# Altium PCB Ebytastic_v0.1.PcbDoc
Units mm, origin at the board's own origin, x right, y up, seen from the top; angles counter-clockwise.
Board outline 55.6 x 41.91 mm, 2 copper layers (Top Layer, Bottom Layer); 11 components, 36 nets, 103 pads, 57 vias.
Unrouted connection lines stored in the file: 6.
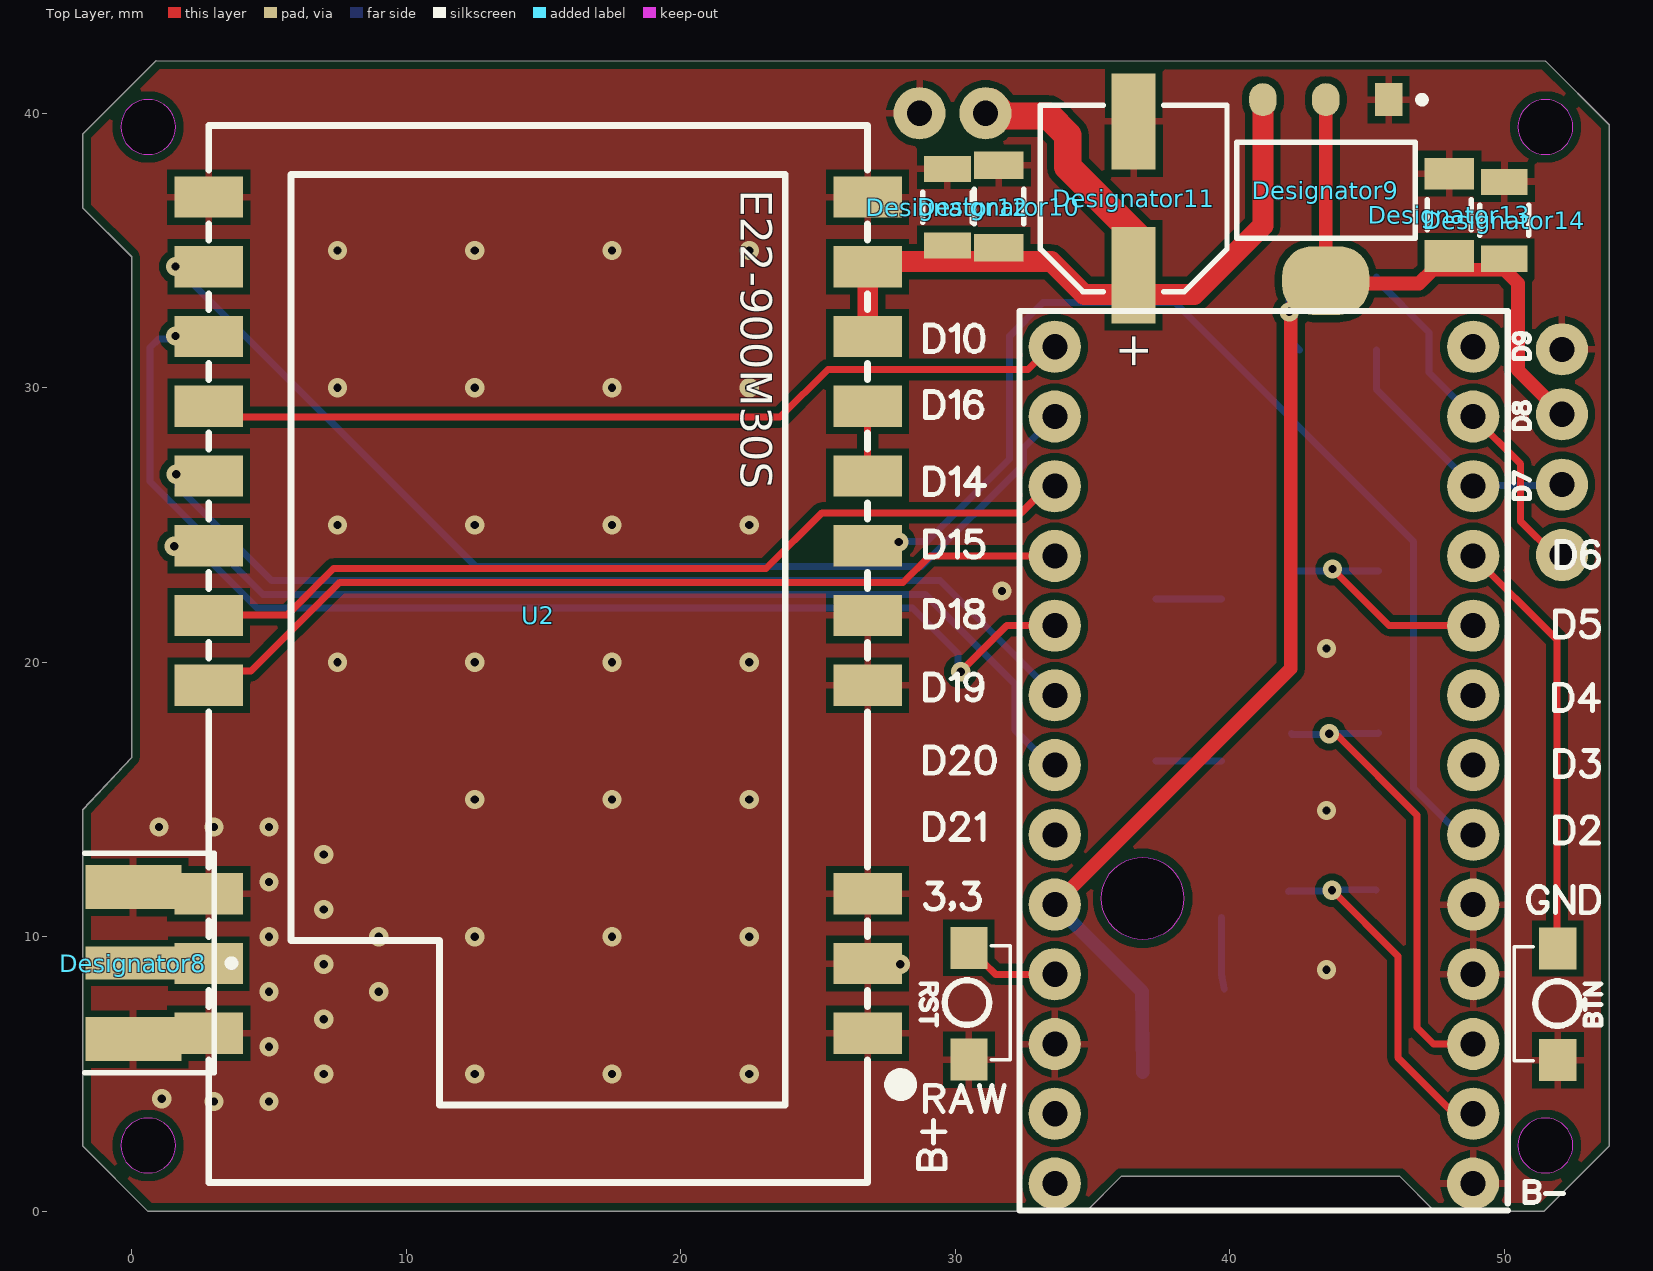
[diagram p0: Top Layer view]
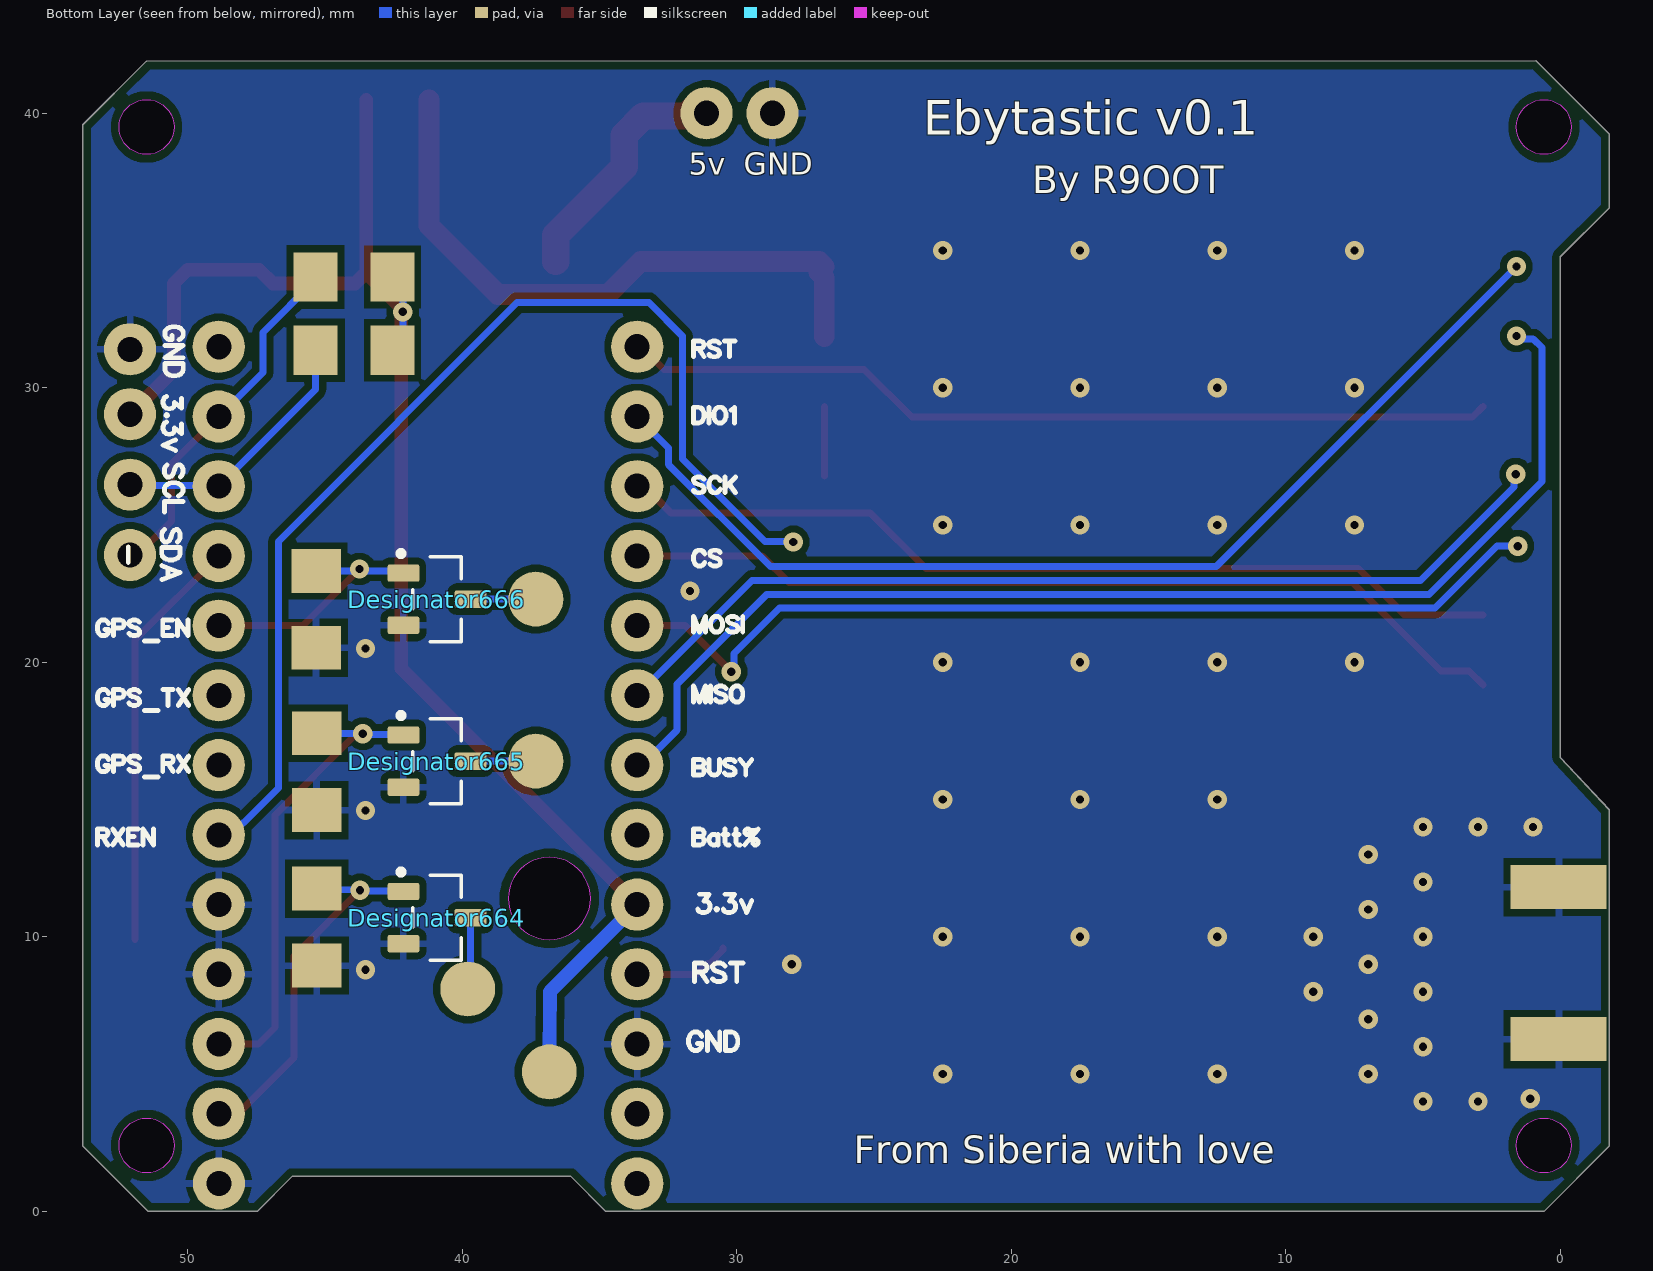
[diagram p1: Bottom Layer view, seen from below]
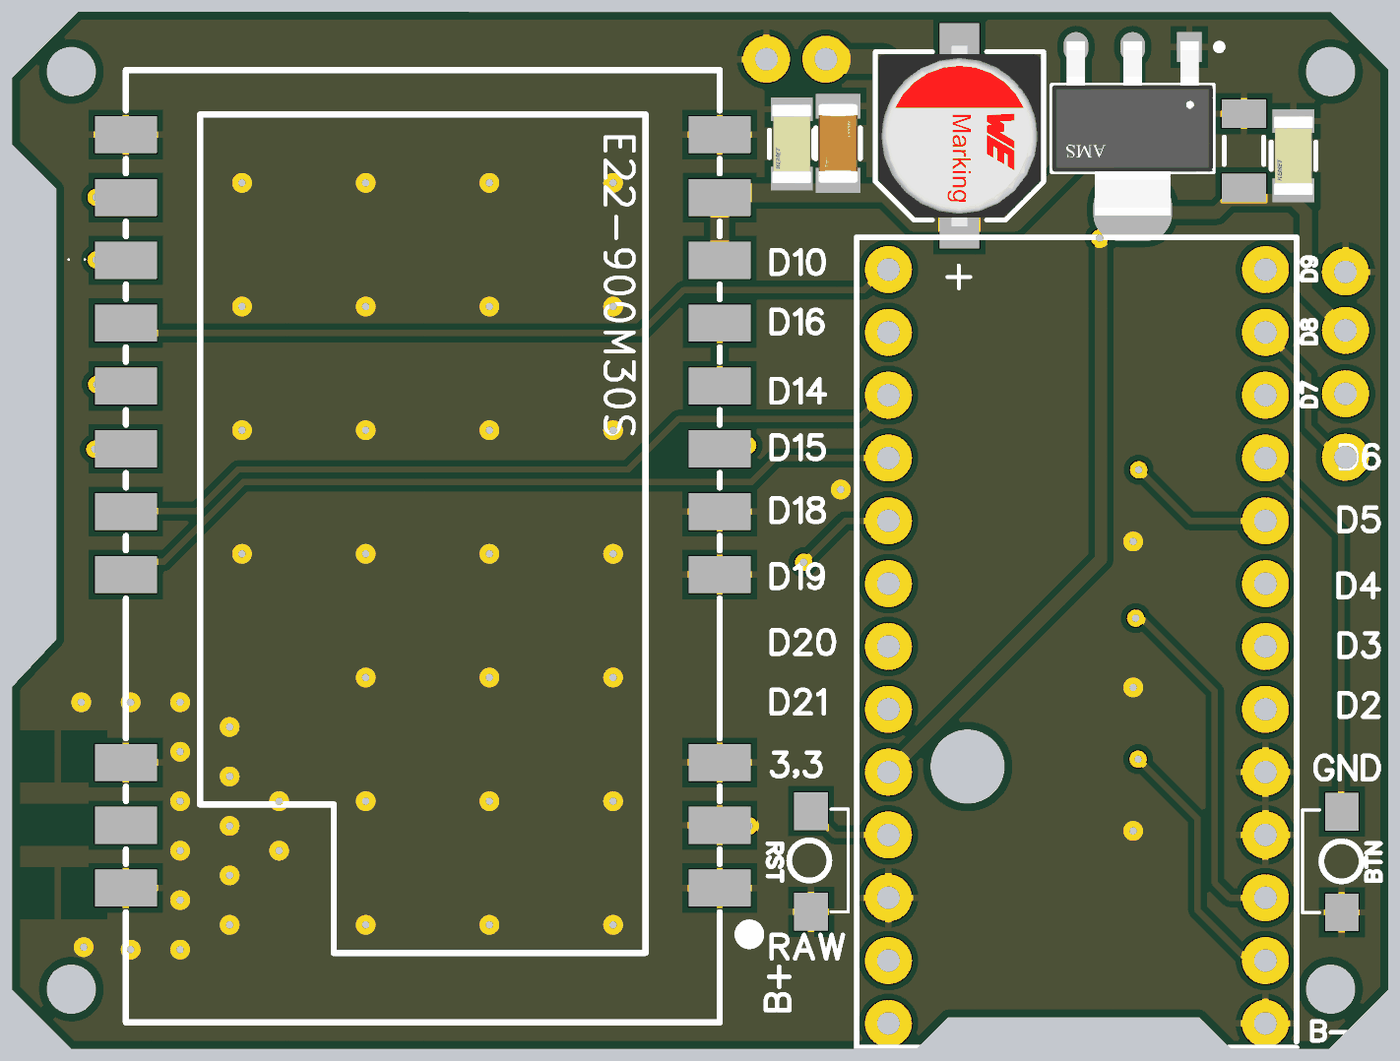
[diagram p2: 3D render of the assembled board from above, using the file's embedded part models]
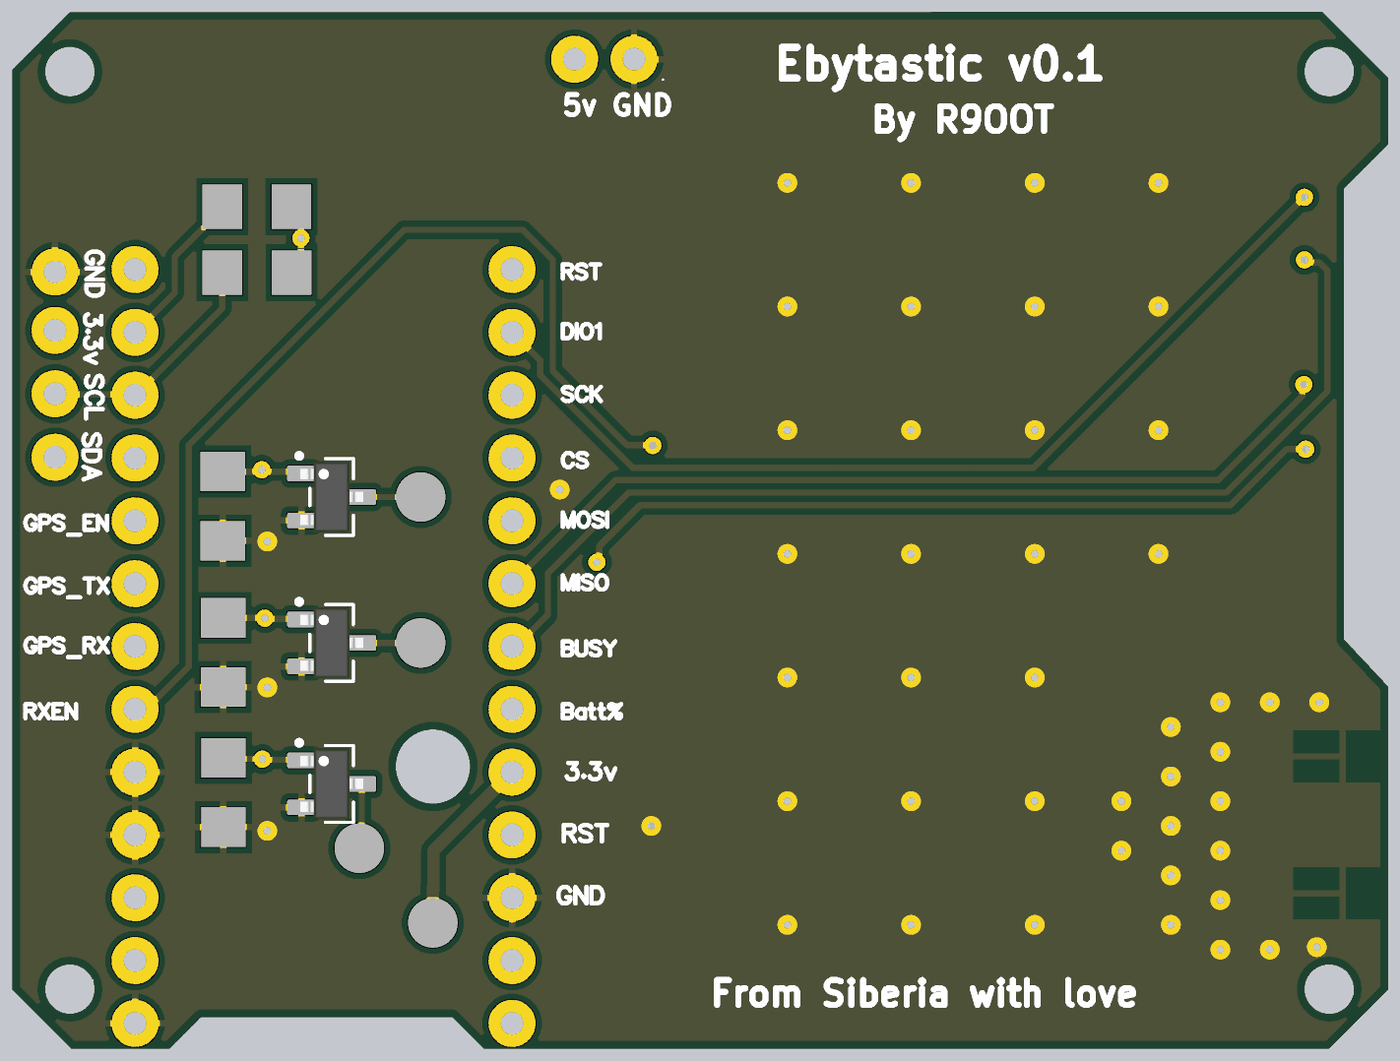
[diagram p3: 3D render of the assembled board from below, using the file's embedded part models]

## Layer stack, top to bottom
Top Solder: solder mask 0.0102, Solder Resist, Dk 3.5
Top Layer: signal copper 0.0356
Dielectric 1: dielectric 0.32, FR-4, Dk 4.8
Bottom Layer: signal copper 0.0356
Bottom Solder: solder mask 0.0102, Solder Resist, Dk 3.5

## Board outline
0.889,41.91 -1.778,39.243 -1.778,36.549 0,34.771 0,16.535 -1.778,14.63 -1.778,2.378 0.6,0 34.771,0 36.041,1.27 46.201,1.27 47.471,0 51.435,0 53.821,2.386 53.821,39.579 51.5,41.9
cut-out: -0.4,2.4 ccw(c0.6,2.4) 0.6,1.4 ccw(c0.6,2.4) 1.6,2.4 ccw(c0.6,2.4) 0.6,3.4 ccw(c0.6,2.4)
cut-out: -0.4,39.5 ccw(c0.6,39.5) 0.6,38.5 ccw(c0.6,39.5) 1.6,39.5 ccw(c0.6,39.5) 0.6,40.5 ccw(c0.6,39.5)
cut-out: 50.5,39.5 ccw(c51.5,39.5) 51.5,38.5 ccw(c51.5,39.5) 52.5,39.5 ccw(c51.5,39.5) 51.5,40.5 ccw(c51.5,39.5)
cut-out: 36.828,9.9 cw(c36.828,11.4) 35.328,11.4 cw(c36.828,11.4) 36.828,12.9 cw(c36.828,11.4) 38.328,11.4 cw(c36.828,11.4)
cut-out: 50.5,2.4 ccw(c51.5,2.4) 51.5,1.4 ccw(c51.5,2.4) 52.5,2.4 ccw(c51.5,2.4) 51.5,3.4 ccw(c51.5,2.4)

## Design rules (kind name [scope] priority, off if disabled: settings)
BoardOutlineClearance [All] p1: gap=0.3 ignorepadtopadclearanceinfootprint=FALSE
Clearance [All] p1: gap=0.25 ignorepadtopadclearanceinfootprint=FALSE
PolygonConnect [All] p1: thpad.connectstyle=Relief thpad.reliefconductorwidth=0.254 thpad.reliefentries=4 thpad.polygonreliefangle="90 Angle" thpad.airgapwidth=0.254 smdpad.connectstyle=Relief smdpad.reliefconductorwidth=0.254 smdpad.reliefentries=4 smdpad.polygonreliefangle="90 Angle" smdpad.airgapwidth=0.254 via.connectstyle=Direct via.reliefconductorwidth=0.254 via.reliefentries=4 via.polygonreliefangle="90 Angle" via.airgapwidth=0.254
RoutingVias [All] p1: holewidth=0.711 width=1.27 viastyle="Through Hole" minholewidth=0.711 minwidth=1.27 maxholewidth=0.711 maxwidth=1.27
SilkToSilkClearance [All] p1: silktosilkclearance=0.15
SilkToSolderMaskClearance [IsPad] p1: minsilkscreentomaskgap=0.15 clearancetoexposedcopper=TRUE
SolderMaskExpansion [All] p1: expansion=0.05 istentingtop=FALSE
Width [All] p1: maxlimit=1 minlimit=0.25 preferedwidth=0.4 minimp=50.000000 maximp=50.000000 favimp=50.000000
28 further rules are at their usual default settings.

## Components (designator, comment, footprint, x,y, rotation, side; value= is the part's Value field where it differs from the comment)
Designator8 "Comment" FP-CON-SMA-EDGE-S-MFG -7.2,9.042 r90 top
Designator9 "Comment" FP-AMS1117-IPC_C 43.5,37.2 r270 top
Designator10 "Comment" FP-CC1206-1_25-MFG 31.592,36.6 r90 top
Designator11 "Comment" WCAP-AS5H_D6.3H7.7 36.5,36.9 r270 top
Designator12 "Comment" FP-C1206C-EB-MFG 29.718,36.576 r90 top
Designator13 "Comment" CAPC1206(3216)130_N 48,36.3 r90 top
Designator14 "Comment" FP-C1206C-EB-MFG 50,36.1 r90 top
Designator664 "Comment" SOT23-3 40.921,10.7 r270 bottom
Designator665 "Comment" SOT23-3 40.921,16.4 r270 bottom
Designator666 "Comment" SOT23-3 40.921,22.3 r270 bottom
U2 "E22-900M30S" WIRELM-SMD_E22-900M30S 14.808,21.717 r0 top

## Footprints (in the part's own frame and the unit in brackets; to place one, negate y for a bottom-side part, rotate by r counter-clockwise, add the part's x,y. Pads: shape width x height; smd on the part's side, far side on the other; paste and mask are expansions set on the pad)
CAPC1206(3216)130_N [mm] "Chip Capacitor, Body 3.2x1.6mm, Height 1.3mm, IPC Medium Density"
  rect 1.15x1.8 smd: 1(-1.5,0) 2(1.5,0)
  silkscreen extent -0.55,-0.8 0.55,0.8, body extent -1.7,-0.9 1.7,0.9, height 1.3
FP-AMS1117-IPC_C [mm]
  rect 1.2x1 smd paste+0 mask+0: 1(-3.295,2.29)
  rrect100% 1.2x1 smd paste+0 mask+0: 2(-3.295,0) 3(-3.295,-2.29)
  rrect87% 2.5x3.182 smd paste+0 mask+0: 4(3.295,0)
  silkscreen extent -3.42,-3.25 1.75,3.63, body extent -3.9,-3.35 3.9,3.35, height 0.25
FP-C1206C-EB-MFG [mm]
  rect 0.95x1.7 smd paste+0 mask+0: 1(-1.4,0) 2(1.4,0)
  silkscreen extent -0.55,-0.9 0.55,0.9, body extent -2,-1 2,1, height 0.25
FP-CC1206-1_25-MFG [mm]
  rect 1x1.8 smd paste+0 mask+0: 1(-1.5,0) 2(1.5,0)
  silkscreen extent -0.63,-0.9 0.63,0.9, body extent -2.2,-1.25 2.2,1.25, height 0.25
FP-CON-SMA-EDGE-S-MFG [mm]
  rect 1.2x3.5 smd paste+0 mask+0: 1(0,-7.26)
  rect 1.6x3.5 smd paste+0 mask+0: 2(-2.77,-7.26) 3(2.77,-7.26)
  rect 1.6x3.5 smd far side paste+0 mask+0: 4(-2.77,-7.26) 5(2.77,-7.26)
  silkscreen extent -4,-10.96 4,-5.5, body extent -3.67,-9.86 3.67,4.86, height 0.25
SOT23-3 [mm]
  rrect20% 0.63x1.15 smd: 1(-0.95,-1.22) 2(0.95,-1.22) 3(0,1.22)
  silkscreen extent -1.76,-1.41 1.55,0.88, body extent -1.44,-1.27 1.44,1.28, height 1.45
WCAP-AS5H_D6.3H7.7 [mm] "Aluminum Electrolytic Capacitors, 6.3x7.7mm"
  rect 3.5x1.6 smd: 1(2.8,0) 2(-2.8,0)
  silkscreen extent -3.4,-3.4 3.4,3.4, body extent -3.65,-3.3 3.65,3.3, height 7.7
WIRELM-SMD_E22-900M30S [mm]
  rect 2.5x1.5 smd paste+0 mask+0.051: 1(12,-15.23) 2(12,-12.69) 3(12,-10.15) 4(12,-2.55) 5(12,-0.01) 6(12,2.53) 7(12,5.07) 8(12,7.61) 9(12,10.15) 10(12,12.69) 11(12,15.23) 12(-12,15.23) 13(-12,12.69) 14(-12,10.15) 15(-12,7.61) 16(-12,5.07) 17(-12,2.53) 18(-12,-0.01) 19(-12,-2.55) 20(-12,-10.15) 21(-12,-12.69) 22(-12,-15.23)
  silkscreen extent -12,-20.66 13.5,17.84

## Part data
Designator664 Designator665 Designator666: library part 1-009-727

## Free pads (board coordinates)
  round 0.102 on Top Overlay: 1(0.488,31.9) 1(1.143,31.9)
  round 0.102 on Bottom Overlay: 1(27.532,39.173)
  round 1.9 hole 0.915: 1(28.7,40) 1(31.1,40) 1(33.628,1.016) 1(33.628,3.556) 1(33.628,6.096) 1(33.628,8.636) 1(33.628,11.176) 1(33.628,13.716) 1(33.628,16.256) 1(33.628,18.796) 1(33.628,21.336) 1(33.628,23.876) 1(33.628,26.416) 1(33.628,28.956) 1(33.628,31.496) 1(48.865,1.016) 1(48.868,3.556) 1(48.868,6.096) 1(48.868,8.636) 1(48.868,11.176) 1(48.868,13.716) 1(48.868,16.256) 1(48.868,18.796) 1(48.868,21.336) 1(48.868,23.876) 1(48.868,26.416) 1(48.868,28.956) 1(48.868,31.496) 1(52.1,31.4) 1(52.102,23.907) 1(52.102,26.472) 1(52.102,29.038)
  rect 1.36x1.53 smd paste+0: 1(30.5,5.53) 1(30.5,9.6) 1(51.954,5.505) 1(51.954,9.575)
  rect 1.6x1.8 smd far side paste+0: 1(42.539,31.369) 1(42.545,34.036) 1(45.339,31.369) 1(45.345,34.036)
  rect 1.8x1.6 smd far side paste+0: 1(45.297,8.954) 1(45.297,11.754) 1(45.306,14.615) 1(45.306,17.415) 1(45.321,20.53) 1(45.321,23.33)
  round 2 smd far side: 2(36.83,5.08) 2(37.321,16.4) 2(37.321,22.3) 2(39.8,8.1)

## Via types
v1: diameter 0.7, hole 0.3, Top Layer to Bottom Layer, 57 vias

## Nets (pads, with @x,y where several pads share a name; then routed paths per layer and width w, separated by ;. In a path a pad name is that pad's centre, name@x,y a point inside that pad or via, vN(x,y) a via of type N, cw(c..) or ccw(c..) an arc to the next point about the centre after c; other vN are vias at no path point)
106: pad.1@48.868,31.496
$Net6: 
$Net7: 
$Net11: 
$Net23: 
$Net24: 
$Net27: 
$Net28: 
$Net31: 
$Net32: 
$Net33: 
$Net34: 
+3.3v: Designator9.2 Designator9.4 Designator13.1 Designator14.1 pad.1@33.628,11.176 pad.1@42.539,31.369 pad.1@42.545,34.036 pad.1@52.102,29.038 pad.2@36.83,5.08 | length 56.8
  Top Layer w0.5: pad.1@33.628,11.176 42.221,19.769 42.221,32.912 Designator9.4@43.507,34.198 ; Designator9.2 43.5,34.205 Designator9.4@43.507,34.198 ; pad.1@52.102,29.038 50.5,30.639 50.5,33.807 50.007,34.3 47.4,34.3 46.9,33.8 43.905,33.8 43.65,34.055 Designator9.4@43.507,34.198
  Bottom Layer w0.254: pad.1@42.539,31.369 42.164,31.744 v1(42.164,32.766) 42.164,33.655 pad.1@42.545,34.036
  Bottom Layer w0.5: pad.1@33.628,11.176 36.8,8.004 pad.2@36.83,5.08
+5v: Designator9.3 Designator10.1 Designator11.1 Designator12.1 pad.1@31.1,40 U2.9 U2.10 | length 32.5
  Top Layer w0.75: U2.9 26.808,34.008 27.008,34.208 U2.10 27.001,34.6 32.1,34.6 33.5,34.6 34.7,33.4 38.7,33.4 41.21,35.91 Designator9.3
  Top Layer w1: pad.1@31,40.4 31.311,40.4 31.811,39.9 33.4,39.9 34.1,39.2 34.1,38.05 36.6,35.55 Designator11.1@36.6,34.6
+B: pad.1@33.628,1.016 pad.1@33.628,3.556 | length 0.2
  Bottom Layer w0.5: pad.1@33.628,3.556 pad.1@33.783,3.711
"AUX_1 008": Designator665.1 pad.1@45.306,17.415 pad.1@48.868,6.096 | length 17.7
  Top Layer w0.254: v1(43.621,17.4) 43.706,17.315 43.936,17.315 46.821,14.43 46.821,6.7 47.425,6.096 pad.1@48.868,6.096
  Bottom Layer w0.254: Designator665.1@42.251,17.4 42.276,17.375 43.596,17.375 43.636,17.415 45.406,17.415 pad.1@45.421,17.43
"AUX_2 006": Designator664.1 pad.1@45.297,11.754 pad.1@48.868,3.556 | length 14.3
  Top Layer w0.254: v1(43.721,11.7) 46.121,9.3 46.121,5.6 48.165,3.556 48.868,3.556 pad.1@48.553,3.871
  Bottom Layer w0.254: Designator664.1 42.166,11.675 43.696,11.675 v1(43.721,11.7) 43.736,11.715 45.306,11.715 pad.1@45.321,11.7
"Batt% 031": pad.1@33.628,13.716
"BUSY 029": pad.1@33.628,16.256 U2.14 | length 44
  Bottom Layer w0.254: v1@1.623,31.773 0.988,31.773 0.676,31.46 0.676,26.58 4.781,22.475 28.909,22.475 32.182,19.202 32.182,17.526 pad.1@33.426,16.281
  other v1: 1.599,31.887
"Button 100": pad.1@48.868,23.876 pad.1@51.954,9.575 | length 15.2
  Top Layer w0.254: pad.1@48.868,23.876 51.921,20.823 pad.1@51.921,9.9
"CS 113": pad.1@33.628,23.876 U2.19 | length 32.8
  Top Layer w0.254: U2.19 3.324,19.683 4.341,19.683 7.565,22.907 28.105,22.907 29.074,23.876 pad.1@33.628,23.876
"DIO1 010": pad.1@33.628,28.956 U2.13 | length 39.2
  Bottom Layer w0.254: v1(1.6,34.417) 12.534,23.483 28.768,23.483 32.483,27.198 32.483,27.811 pad.1@33.628,28.956
DIO2: U2.7 U2.8 | length 2.5
  Top Layer w0.254: U2.7 U2.8
GND: Designator8.2 Designator8.3 Designator8.4 Designator8.5 Designator9.1 Designator10.2 Designator11.2 Designator12.2 Designator13.2 Designator14.2 Designator664.2 Designator665.2 Designator666.2 pad.1@28.7,40 pad.1@30.5,5.53 pad.1@33.628,6.096 pad.1@45.297,8.954 pad.1@45.306,14.615 pad.1@45.321,20.53 pad.1@48.865,1.016 pad.1@48.868,8.636 pad.1@48.868,11.176 pad.1@51.954,5.505 pad.1@52.1,31.4 U2.1 U2.2 U2.3 U2.4 U2.5 U2.11 U2.12 U2.20 U2.22
  other v1: 3,4 5,4 1.1,4.1 7,5 12.5,5 17.5,5 22.5,5 5,6 7,7 5,8 9,8 43.521,8.8 7,9 28,9 5,10 9,10 12.5,10 17.5,10 22.5,10 7,11 5,12 7,13 1,14 3,14 5,14 43.521,14.6 12.5,15 17.5,15 22.5,15 7.5,20 12.5,20 17.5,20 22.5,20 43.521,20.5 31.7,22.6 7.5,25 12.5,25 17.5,25 22.5,25 7.5,30 12.5,30 17.5,30 22.5,30 7.5,35 12.5,35 17.5,35 22.5,35
"GPS_EN 024": Designator666.1 pad.1@45.321,23.33 pad.1@48.868,21.336 | length 9.1
  Top Layer w0.254: v1(43.742,23.4) 45.806,21.336 pad.1@48.868,21.336
  Bottom Layer w0.254: Designator666.1@42.276,23.33 pad.1@45.421,23.33
"GPS_RX 020": pad.1@48.868,16.256
"GPS_TX 022": pad.1@48.868,18.796
"MISO 002": pad.1@33.628,18.796 U2.16 | length 35.6
  Bottom Layer w0.254: v1(1.626,26.848) 1.685,26.788 1.685,26.382 5.088,22.979 29.445,22.979 pad.1@33.628,18.796
"MOSI 115": pad.1@33.628,21.336 U2.17 | length 35
  Top Layer w0.254: v1(30.201,19.66) 31.877,21.336 pad.1@33.628,21.336
  Bottom Layer w0.254: v1(1.549,24.232) 2.311,24.232 4.572,21.971 28.448,21.971 30.102,20.317 30.102,19.758 v1(30.201,19.66)
"NRST 009": pad.1@33.628,31.496 U2.15 | length 32
  Top Layer w0.254: U2.15 3.205,28.931 23.622,28.931 25.358,30.667 32.644,30.667 33.473,31.496 pad.1@33.628,31.496
RST: pad.1@30.5,9.6 pad.1@33.628,8.636 | length 3.6
  Top Layer w0.254: pad.1@30.5,9.6 30.5,9.515 30.98,9.035 31.065,9.035 31.464,8.636 pad.1@33.628,8.636
"RXEN 017": pad.1@48.868,13.716 U2.6 | length 40.4
  Bottom Layer w0.254: v1(27.94,24.384) 27.958,24.402 28.974,24.402 31.979,27.407 31.979,31.879 33.2,33.1 38,33.1 46.7,24.4 46.7,15.421 47.949,14.172 47.967,14.172 48.423,13.716 pad.1@48.868,13.716
"SCK 111": pad.1@33.628,26.416 U2.18 | length 32.8
  Top Layer w0.254: U2.18@2.808,21.732 5.678,21.732 7.357,23.411 23.106,23.411 25.142,25.447 32.405,25.447 33.374,26.416 pad.1@33.628,26.416
"SCL 011": pad.1@45.339,31.369 pad.1@48.868,26.416 pad.1@52.102,26.472 | length 9.7
  Bottom Layer w0.254: pad.1@45.339,31.369 45.339,29.945 48.868,26.416 48.896,26.444 52.073,26.444 pad.1@52.102,26.472
"SDA 104": pad.1@45.345,34.036 pad.1@48.868,28.956 pad.1@52.102,23.907 | length 13.1
  Top Layer w0.254: pad.1@48.868,28.956 50.6,27.224 50.6,25.134 51.827,23.907 pad.1@52.102,23.907
  Bottom Layer w0.254: pad.1@45.345,34.036 45.345,33.936 47.263,32.018 47.263,30.561 pad.1@48.868,28.956
"V In": 
pads on no net: Designator8.1 Designator664.3 Designator665.3 Designator666.3 U2.21
copper on no net: | length 7.4
  Bottom Layer w0.254: 37.321,16.4 39.701,16.4 ; 37.321,22.3 39.701,22.3 ; 39.701,10.7 39.701,8.62 39.8,8.1

## Polygon pours and split planes (outlines as drawn)
GND on Top Layer "+24_IO" (solid, remove dead copper, pour order 1): -2.057,-0.995 55.448,-0.995 55.448,51.105 -2.057,51.105
GND on Bottom Layer "+24_IO" (solid, remove dead copper, pour order 0): -2.057,-0.995 55.448,-0.995 55.448,51.105 -2.057,51.105

## Silkscreen, mask and mechanical layers (free items; w line width, h text height)
Top Overlay:
  drawing of 676 lines, arcs and shapes, not listed
Bottom Overlay:
  drawing of 780 lines, arcs and shapes, not listed
  text "Ebytastic v0.1" at 23.2,39.217 h1.25
  text "GND" at 29.746,37.754 h0.8
  text "5v" at 31.746,37.754 h0.8
  text "By R9OOT" at 19.246,37.087 h1
  text "From Siberia with love" at 25.746,1.754 h1
Mechanical 1:
  circle w0.1: c23.227,2.353 r1
  circle w0.1: c8.407,11.4 r1.5
  circle w0.1: c2.399,2.353 r1
  lines w0.1: 7.62,1.27 17.78,1.27 19.05,0 24.13,0 25.4,1.27

## Text inside footprints (layer, text, board x,y; h text height)
Designator11: Top Overlay "+" at 36,32.05 h1.22 r270